# Altium PCB Telemetry_ADC.PcbDoc
Units mm, origin at the board's own origin, x right, y up, seen from the top; angles counter-clockwise.
Board outline 90 x 28 mm, 2 copper layers (Top Layer, Bottom Layer); 18 components, 18 nets, 96 pads, 16 vias.
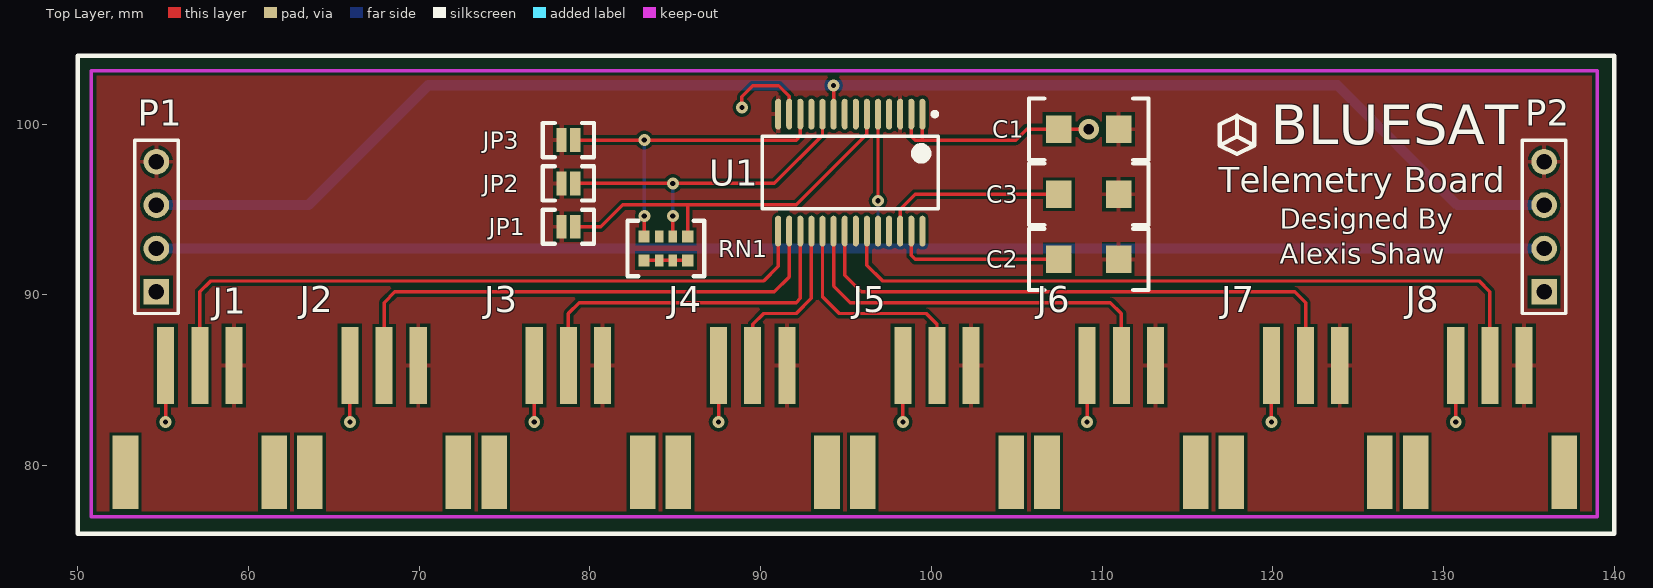
[diagram p0: Top Layer view]
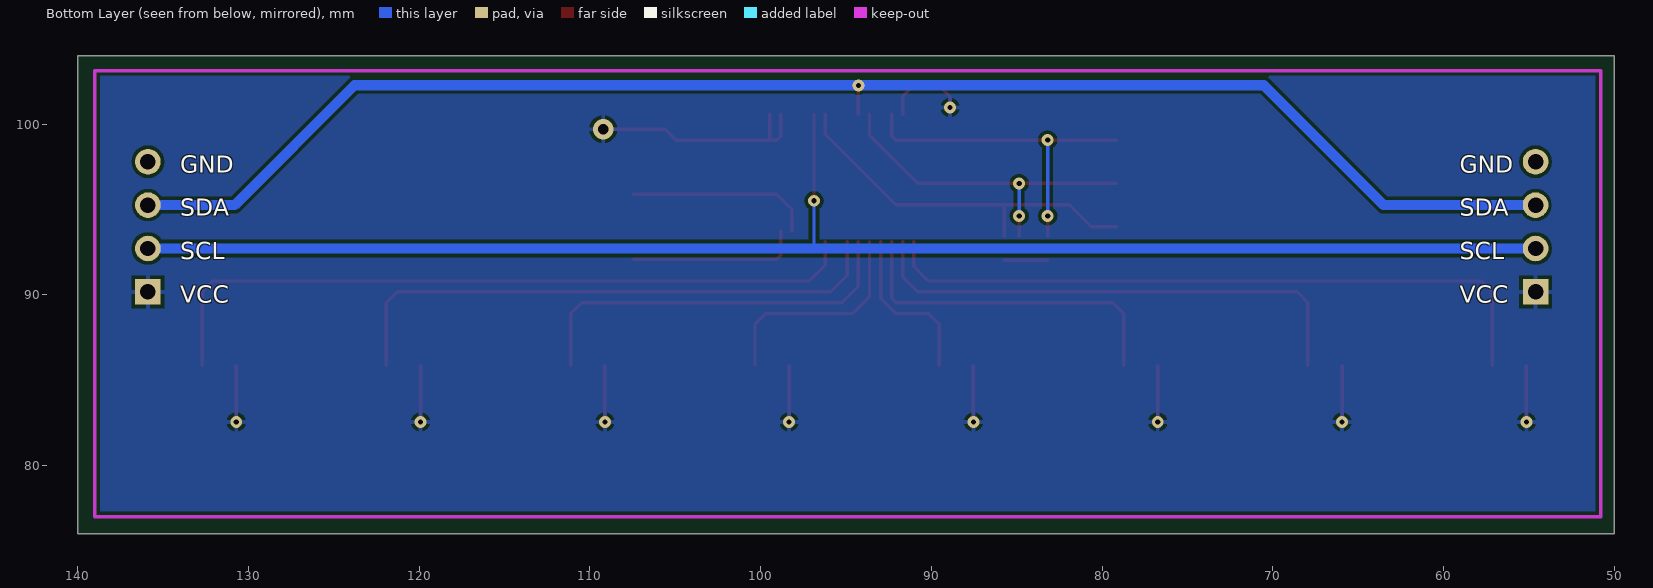
[diagram p1: Bottom Layer view, seen from below]

## Layer stack, top to bottom
Top Layer: signal copper 0.0356
Dielectric: dielectric 0.32, FR-4, Dk 4.8
Bottom Layer: signal copper 0.0356

## Board outline
50,104 140,104 140,76 50,76

## Design rules (kind name [scope] priority, off if disabled: settings)
Clearance [All] p1: gap=0.2
PolygonConnect [All] p1: connectstyle=Relief reliefconductorwidth=0.254 reliefentries=4 polygonreliefangle="90 Angle"
RoomDefinition TELM0002ADC [InComponentClass('TELM0002ADC')] p1: confinementstyle=ConfineIn formatcopy=TRUE lockcomponents=FALSE outline 51,77 139,77 139,103 51,103
RoutingVias [All] p1: holewidth=0.3 width=0.7 viastyle="Through Hole" minholewidth=0.711 minwidth=1.27 maxholewidth=0.711 maxwidth=1.27
SilkscreenOverComponentPads [All] p1: minsilkscreentomaskgap=0.254
SolderMaskExpansion [All] p1: expansion=0.102
Width [All] p1: maxlimit=1 minlimit=0.2 preferedwidth=0.3
27 further rules are at their usual default settings.

## Components (designator, comment, footprint, x,y, rotation, side; value= is the part's Value field where it differs from the comment)
C1 "1206 Cap" "1206 Cap" 109.22,99.695 r0 top
C2 "1206 Cap" "1206 Cap" 109.22,92.075 r0 top
C3 "1206 Cap" "1206 Cap" 109.22,95.885 r0 top
J1 "S3B-PH-SM4-TB" S3B-PH-SM4-TB 57.15,78.105 r0 top
J2 "S3B-PH-SM4-TB" S3B-PH-SM4-TB 67.945,78.105 r0 top
J3 "S3B-PH-SM4-TB" S3B-PH-SM4-TB 78.74,78.105 r0 top
J4 "S3B-PH-SM4-TB" S3B-PH-SM4-TB 89.535,78.105 r0 top
J5 "S3B-PH-SM4-TB" S3B-PH-SM4-TB 100.33,78.105 r0 top
J6 "S3B-PH-SM4-TB" S3B-PH-SM4-TB 111.125,78.105 r0 top
J7 "S3B-PH-SM4-TB" S3B-PH-SM4-TB 121.92,78.105 r0 top
J8 "S3B-PH-SM4-TB" S3B-PH-SM4-TB 132.715,78.105 r0 top
JP1 "Jumper" "Solder Jumper C" 78.74,93.98 r0 top
JP2 "Jumper" "Solder Jumper C" 78.74,96.52 r0 top
JP3 "Jumper" "Solder Jumper C" 78.74,99.06 r0 top
P1 "Header 4" HDR1X4 54.61,90.17 r90 top
P2 "Header 4" HDR1X4 135.89,90.17 r90 top
RN1 "RN4" ACAS_0612_AC 84.455,92.71 r180 top
U1 "MAX127" "SSOP28 - MAX127" 95.25,97.155 r270 top

## Footprints (in the part's own frame and the unit in brackets; to place one, negate y for a bottom-side part, rotate by r counter-clockwise, add the part's x,y. Pads: shape width x height; smd on the part's side, far side on the other; paste and mask are expansions set on the pad)
"1206 Cap" [mm] "1206 Capacitor"
  rect 1.5x1.6 smd: 1(1.75,0) 2(-1.75,0)
  silkscreen extent -3.5,-1.8 3.5,1.8, body extent -1.6,-0.8 1.6,0.8, height 1.8
ACAS_0612_AC [mm] "Resistor network"
  rect 0.65x0.7 smd: 1(-1.275,-0.7) 4(1.275,-0.7) 5(1.275,0.7) 8(-1.275,0.7)
  rect 0.5x0.7 smd: 2(-0.4,-0.7) 3(0.4,-0.7) 6(0.4,0.7) 7(-0.4,0.7)
  silkscreen extent -2.25,-1.63 2.25,1.63
HDR1X4 [mm] "Connector; Header; 4 Position"
  rect 1.5x1.5 hole 0.9: 1(0,0)
  round 1.5 hole 0.9: 2(2.54,0) 3(5.08,0) 4(7.62,0)
  silkscreen extent -1.27,-1.27 8.89,1.27
S3B-PH-SM4-TB [mm]
  rect 1x4.5 smd: 1(-2,7.75) 2(0,7.75) 3(2,7.75)
  rect 1.5x4.3 smd: MECH(-4.35,1.5) MECH(4.35,1.5)
  body extent -4.95,0.2 4.95,8.8, height 5.5
"Solder Jumper C" [mm] "Solder Jumper C"
  rect 0.6x1.4 smd: 1(0.4,0) 2(-0.4,0)
  silkscreen extent -1.5,-1 1.5,1
"SSOP28 - MAX127" [mm] "SOP, 28-Leads, Body 10.3x5.4mm (max), Pitch 0.65mm, IPC Medium Density"
  oval 1.8x0.35 smd: 1(-3.425,4.225) 2(-3.425,3.575) 3(-3.425,2.925) 4(-3.425,2.275) 5(-3.425,1.625) 6(-3.425,0.975) 7(-3.425,0.325) 8(-3.425,-0.325) 9(-3.425,-0.975) 10(-3.425,-1.625) 11(-3.425,-2.275) 12(-3.425,-2.925) 13(-3.425,-3.575) 14(-3.425,-4.225) 15(3.425,-4.225) 16(3.425,-3.575) 17(3.425,-2.925) 18(3.425,-2.275) 19(3.425,-1.625) 20(3.425,-0.975) 21(3.425,-0.325) 22(3.425,0.325) 23(3.425,0.975) 24(3.425,1.625) 25(3.425,2.275) 26(3.425,2.925) 27(3.425,3.575) 28(3.425,4.225)
  silkscreen extent -3.55,-5.15 2.12,5.15, body extent -2.69,-5.17 2.69,5.17, height 1.99

## Part data
C1 C2 C3: library part "1206 MLCC - X7R, 10%", "1206 MLCC - X7R, 10%"
J1 J2 J3 J4 J5 J6 J7 J8: "JST connector"
JP1 JP2 JP3: library part "Solder Bridge", "Solder Bridge"
P1 P2: "Header, 4-Pin"
U1: "8 Channel, 12 bit, I2C DAS"

## Via types
v1: diameter 0.7, hole 0.3, Top Layer to Bottom Layer, 15 vias
v2: diameter 1.2, hole 0.6, Top Layer to Bottom Layer, tented both sides, 1 vias

## Nets (pads, with @x,y where several pads share a name; then routed paths per layer and width w, separated by ;. In a path a pad name is that pad's centre, name@x,y a point inside that pad or via, vN(x,y) a via of type N, cw(c..) or ccw(c..) an arc to the next point about the centre after c; other vN are vias at no path point)
5V0: RN1.5 RN1.6 RN1.7 RN1.8 | length 2.6
  Top Layer w0.2: RN1.5 RN1.6 RN1.7 RN1.8
A0: JP1.1 RN1.1 U1.6 | length 22.4
  Top Layer w0.2: JP1.1 80.645,93.98 81.93,95.265 92.09,95.265 96.225,99.4 U1.6 ; RN1.1 85.73,95.26
A1: JP2.1 RN1.2 U1.10 | length 20
  Top Layer w0.2: JP2.1 v1(84.855,96.52) 90.805,96.52 93.625,99.34 U1.10 ; RN1.2 v1(84.855,94.615)
  Bottom Layer w0.2: v1(84.855,94.615) v1(84.855,96.52)
A2: JP3.1 RN1.4 U1.12 | length 20.2
  Top Layer w0.2: JP3.1 v1(83.185,99.06) 92.075,99.06 92.325,99.31 U1.12 ; RN1.4 v1@83.18,94.61
  Bottom Layer w0.2: v1(83.185,94.615) v1(83.185,99.06)
GND: C1.1 C2.1 C3.1 J1.3 J2.3 J3.3 J4.3 J5.3 J6.3 J7.3 J8.3 JP1.2 JP2.2 JP3.2 P1.4 P2.4 U1.3 U1.14
IN0: J1.2 U1.15 | length 40.2
  Top Layer w0.2: J1.2 57.15,90.17 57.785,90.805 90.17,90.805 91.025,91.66 U1.15@91.025,93.095
IN1: J2.2 U1.16 | length 30.1
  Top Layer w0.2: J2.2 67.945,89.535 68.58,90.17 90.805,90.17 91.675,91.04 U1.16@91.675,93.095
IN2: J3.2 U1.17 | length 20.3
  Top Layer w0.2: J3.2 78.74,88.9 79.375,89.535 92.075,89.535 92.325,89.785 U1.17@92.325,93.095
IN3: J4.2 U1.18 | length 9.8
  Top Layer w0.2: J4.2 89.535,88.265 90.17,88.9 92.075,88.9 92.975,89.8 U1.18@92.975,93.095
IN4: J5.2 U1.19 | length 13
  Top Layer w0.2: U1.19@93.625,93.095 93.625,89.89 94.615,88.9 99.695,88.9 100.33,88.265 J5.2
IN5: J6.2 U1.20 | length 23.1
  Top Layer w0.2: U1.20@94.275,93.095 94.275,90.51 95.25,89.535 110.49,89.535 111.125,88.9 J6.2
IN6: J7.2 U1.21 | length 33.3
  Top Layer w0.2: U1.21@94.925,93.095 94.925,91.13 95.885,90.17 121.285,90.17 121.92,89.535 J7.2
IN7: J8.2 U1.23 | length 42.8
  Top Layer w0.2: U1.23@96.225,93.095 96.225,91.735 97.155,90.805 132.08,90.805 132.715,90.17 J8.2
REF: C2.2 U1.27 | length 10.2
  Top Layer w0.2: U1.27 98.825,92.31 99.06,92.075 C2.2
REFADJ: C3.2 U1.26 | length 10.9
  Top Layer w0.2: U1.26 98.175,95 99.06,95.885 C3.2
SCL: P1.2 P2.2 U1.5 | length 89
  Top Layer w0.2: v1(96.875,95.504) U1.5
  Bottom Layer w0.2: 96.875,92.863 v1(96.875,95.504)
  Bottom Layer w0.6: P1.2 P2.2
SDA: P1.3 P2.3 U1.9 | length 88.8
  Top Layer w0.2: U1.9 v1(94.275,102.256)
  Bottom Layer w0.6: P1.3 63.5,95.25 70.52,102.27 123.79,102.27 130.81,95.25 P2.3
VCC: C1.2 J1.1 J2.1 J3.1 J4.1 J5.1 J6.1 J7.1 J8.1 P1.1 P2.1 U1.1 U1.2 U1.13 | length 45
  Top Layer w0.2: v1(55.15,82.55) J1.1 ; v1(65.945,82.55) J2.1 ; v1(76.74,82.55) J3.1 ; v1(87.535,82.55) J4.1 ; v1(88.9,100.965) 88.9,101.6 89.535,102.235 91.059,102.235 91.675,101.619 U1.13 ; v1(98.33,82.55) J5.1 ; U1.2 98.825,99.295 99.06,99.06 99.475,99.06 ; U1.1 99.475,99.06 ; v1(109.125,82.55) J6.1 ; v2(109.22,99.695) C1.2 105.575,99.695 104.94,99.06 99.475,99.06 ; v1(119.92,82.55) J7.1 ; v1(130.715,82.55) J8.1
pads on no net: J1.MECH J2.MECH J3.MECH J4.MECH J5.MECH J6.MECH J7.MECH J8.MECH RN1.3 U1.4 U1.7 U1.8 U1.11 U1.22 U1.24 U1.25 U1.28

## Polygon pours and split planes (outlines as drawn)
VCC on Bottom Layer "Bottom Layer-No Net" (solid, pour order 2): 50.8,102.87 139,102.87 139,77 50.8,77
GND on Top Layer "Bottom Layer-No Net" (solid, pour order 4): 50.8,102.87 139,102.87 139,77 51,77

## Keep-outs
Keep-Out Layer:
  lines w0.2: 50.8,77 139,77 139,103.124 50.8,103.124 50.8,77

## Silkscreen, mask and mechanical layers (free items; w line width, h text height)
Top Overlay:
  lines w0.254: 116.884,98.752 117.9,99.26 ; 116.884,98.752 116.884,99.97 117.9,100.478 ; 116.884,98.752 117.9,98.244 118.916,98.752 ; 117.9,99.26 118.916,98.752 ; 117.9,99.26 117.9,100.478 ; 117.9,100.478 118.916,99.97 118.916,98.752 ; 50,76 140,76 140,104 50,104 50,76
  text "BLUESAT" at 119.888,98.044 h4
  text "Telemetry Board" at 116.84,95.504 h2.49
  text "Designed By" at 120.396,93.472 h2
  text "Alexis Shaw" at 120.396,91.44 h2
Bottom Overlay:
  text "GND" at 59.055,97.155 h1
  text "GND" at 133.985,97.155 h1
  text "SDA" at 59.055,94.615 h1
  text "SDA" at 133.985,94.615 h1
  text "SCL" at 59.055,92.075 h1
  text "SCL" at 133.985,92.075 h1
  text "VCC" at 59.055,89.535 h1
  text "VCC" at 133.985,89.535 h1

## Dimensions
50.8,77 to 139,77 on Mechanical 1
50.8,77 to 50.8,103.124 on Mechanical 1